# EAGLE board airflow_sensor_DC (EAGLE 9.5.2)
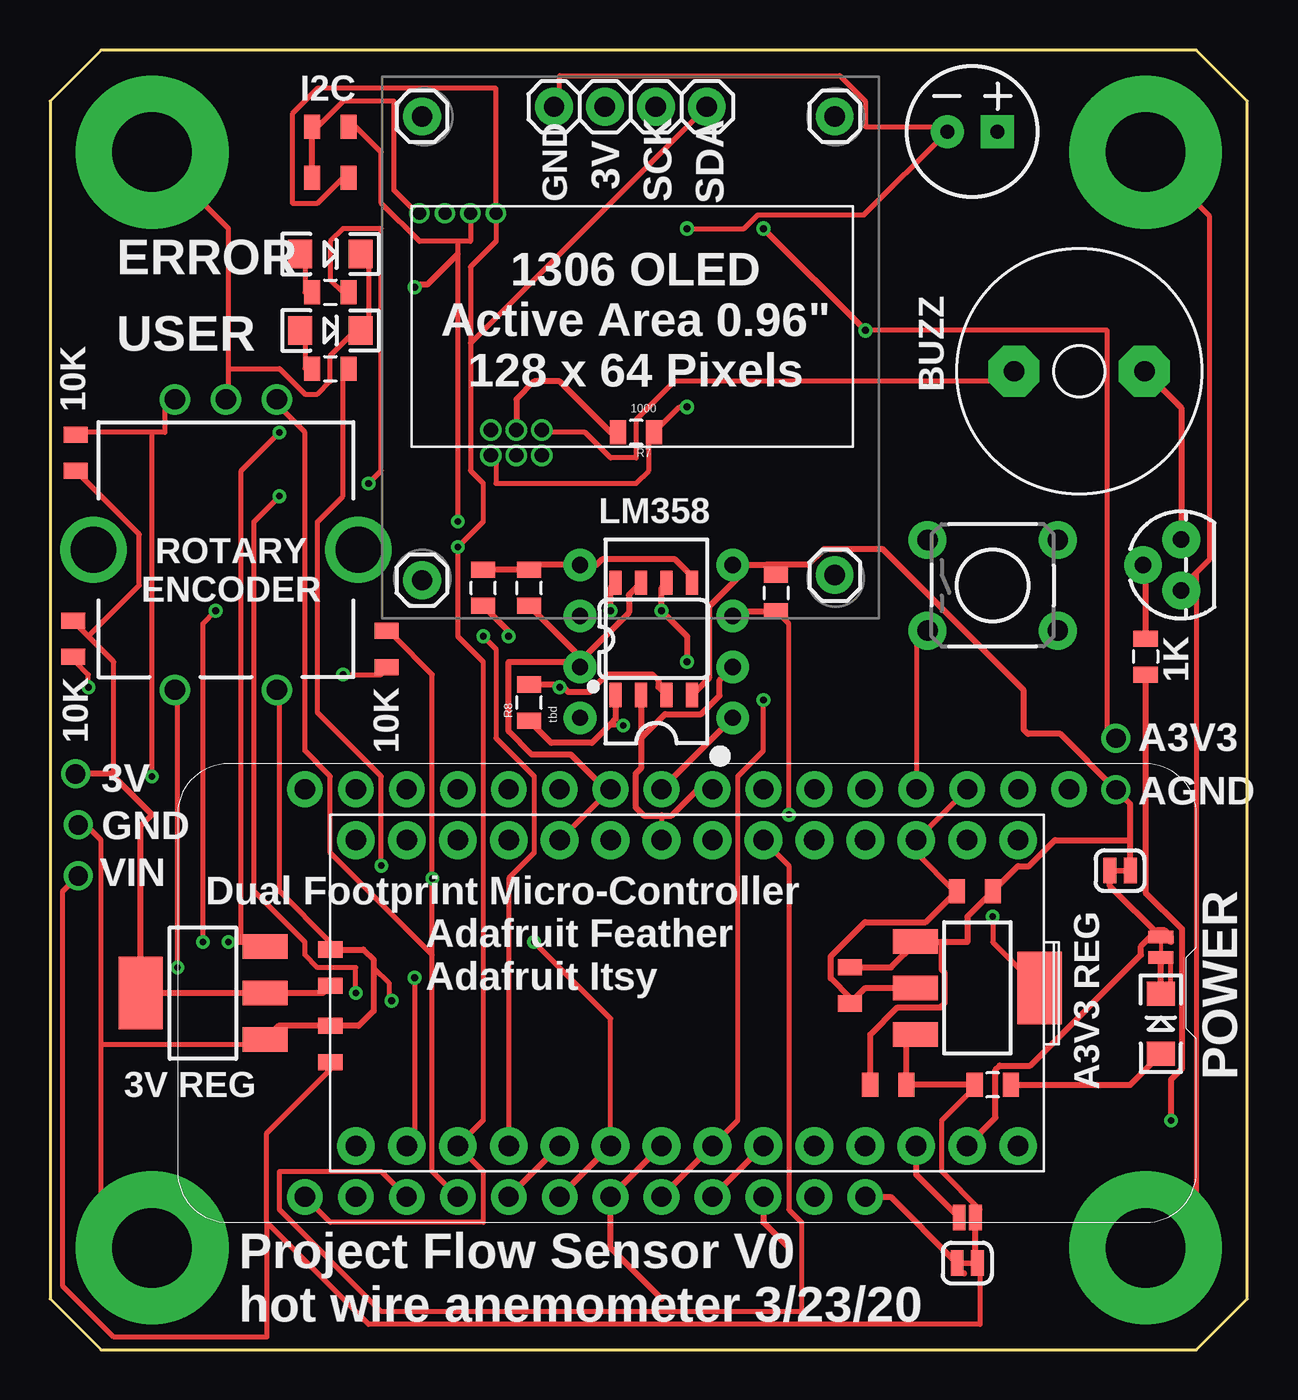
[diagram p0: board, top side]
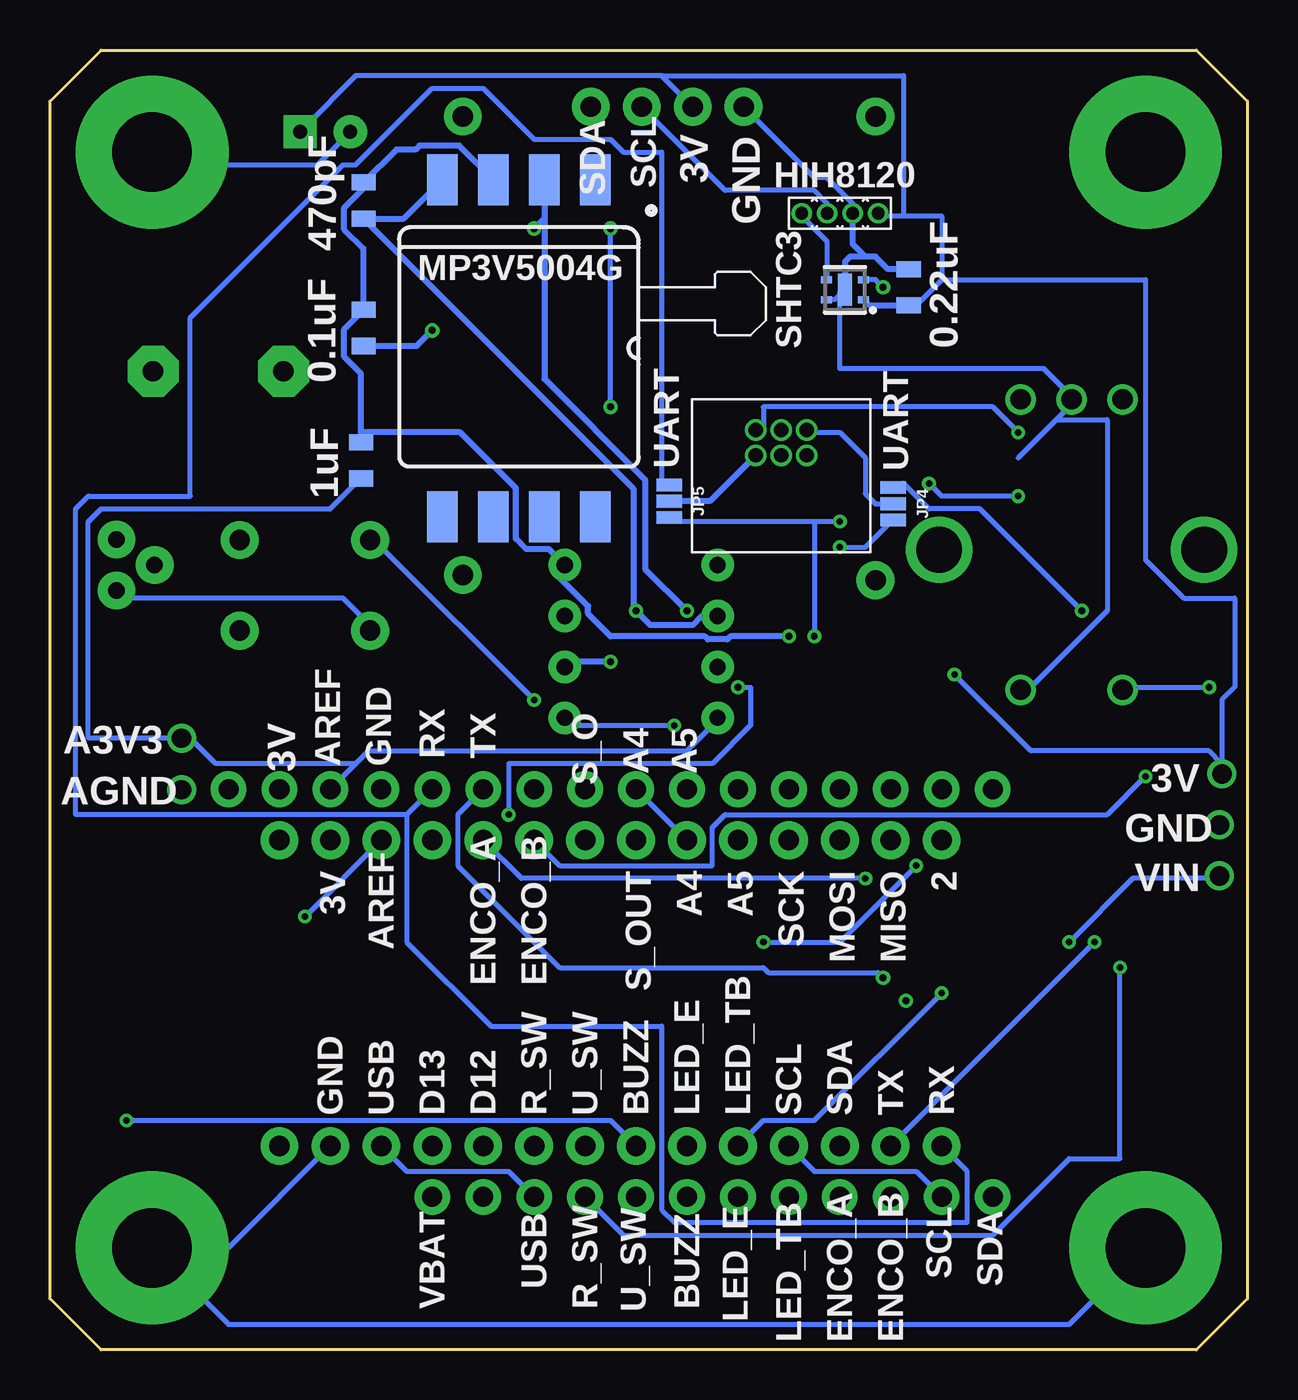
[diagram p1: board, bottom side, seen from below]

Size 59.69 x 64.77 mm. Coordinates in mm from the lower left corner, seen from the top.
Outline: 0,62.23 0,2.54 2.54,0 57.15,0 59.69,2.54 59.69,62.23 57.15,64.77 2.54,64.77 0,62.23
Copper layers (1*16): Top 0.0356mm / dielectric 1.5011mm / Bottom 0.0356mm
Design rules "LaenPCBOrder *": minimum track width 10mil, minimum drill 13mil, track to track 8mil, track to pad 8mil, pad to pad 8mil, via to via 8mil, smd to smd 6mil, copper to edge 15mil, drill to drill 6mil, minimum pad ring 7mil, minimum via ring 7mil, stop-mask expansion 3mil, vias tented up to drill 25mil, thermal gap 10mil
Net classes: 1 highpower: width 0.305 mm, drill 0.483 mm; 2 lowpower: width 0.305 mm, drill 0.483 mm

## Footprints (pad centres in the part's own frame; a part is rotated, then mirrored left to right if it is on the bottom)
SOT223 = smd 1.219 x 2.235: 1 -2.311,-3.099; 2 0,-3.099; 3 2.311,-3.099 | smd 3.6 x 2.2: 4 0,3.099
0805 = smd 0.8 x 1.2: 1 -0.9,0; 2 0.9,0
CPOL-RADIAL-2.5MM-6.5MM = drill 0.7 pad 1.651 square: 1 1.25,0 | drill 0.7 pad 1.651: 2 -1.25,0
LED-1206 = smd 1.2 x 1.4: A -1.5,0; C 1.5,0
1X01 = drill 1.016 pad 1.88: 1 0,0
SMT-JUMPER_2_NO_NO-SILK = smd 0.635 x 1.27: 1 -0.406,0; 2 0.406,0
SMT-JUMPER_2_NC_TRACE_SILK = smd 0.635 x 1.27: 1 -0.508,0; 2 0.508,0
SMT-JUMPER_3_NO_NO-SILK = smd 0.635 x 1.27: 1 -0.813,0; 2 0,0; 3 0.813,0
FEATHERWING_DIM = drill 1 pad 1.778: 1 6.35,1.27; 2 8.89,1.27; 3 11.43,1.27; 4 13.97,1.27; 5 16.51,1.27; 6 19.05,1.27; 7 21.59,1.27; 8 24.13,1.27; 9 26.67,1.27; 10 29.21,1.27; 11 31.75,1.27; 12 34.29,1.27; 13 36.83,1.27; 14 39.37,1.27; 15 41.91,1.27; 16 44.45,1.27; 17 44.45,21.59; 18 41.91,21.59; 19 39.37,21.59; 20 36.83,21.59; 21 34.29,21.59; 22 31.75,21.59; 23 29.21,21.59; 24 26.67,21.59; 25 24.13,21.59; 26 21.59,21.59; 27 19.05,21.59; 28 16.51,21.59
TO-92 = drill 0.813 pad 1.88: 1 -1.27,0; 2 0,1.905; 3 1.27,0
STANDOFF_ELECTRICAL_5_32 = drill 3.969 pad 7.62: P1 0,0
TACTILE_SWITCH_PTH_6.0MM_KIT = drill 1.016 pad 1.88: 1 -3.251,2.261; 2 3.251,2.261; 3 -3.251,-2.261; 4 3.251,-2.261
ROTARY_ENC_PLAIN = drill 1.016: A 7.493,-2.54; B 7.493,2.54; C 7.493,0; SW+ -6.985,2.54; SW- -6.985,-2.54 | drill 2.286: P$3 0,6.604; P$4 0,-6.604
PAD-JUMPER-2-NC_BY_TRACE_NO_SILK = smd 0.635 x 1.27: 1 -0.508,0; 2 0.508,0
AL60P = drill 1.016 pad 2.54 octagon: 1 -3.251,0; 2 3.251,0
DIP08 = drill 0.813 pad 1.626: 1 -3.81,-3.81; 2 -1.27,-3.81; 3 1.27,-3.81; 4 3.81,-3.81; 5 3.81,3.81; 6 1.27,3.81; 7 -1.27,3.81; 8 -3.81,3.81
SO08 = smd 0.6 x 1.2: 1 -1.905,-2.8; 2 -0.635,-2.8; 3 0.635,-2.8; 4 1.905,-2.8; 5 1.905,2.8; 6 0.635,2.8; 7 -0.635,2.8; 8 -1.905,2.8
SHTC3 = smd 0.55 x 0.35: 1 -0.925,0.5; 2 -0.925,-0.5; 3 0.925,-0.5; 4 0.925,0.5 | smd 0.7 x 1.6: 5 0,0
OLED_1306 = drill 1.016 pad 1.88: 3V 11.15,-1.55; GND 8.61,-1.55; SCK 13.69,-1.55; SDA 16.23,-1.55
MP3V5004GP = smd 2.54 x 1.524: 1 -8.388,3.81; 2 -8.388,1.27; 3 -8.388,-1.27; 4 -8.388,-3.81; 5 8.388,-3.81; 6 8.388,-1.27; 7 8.388,1.27; 8 8.388,3.81
HIH8120_TH = drill 0.635 pad 1.016: 1 -1.905,0; 2 -0.635,0; 3 0.635,0; 4 1.905,0
1X01-40MILL = drill 0.965 pad 1.397: 1 0,0
F660/F662 = drill 0.711 pad 1.067: 1 0,0; 2 0,1.27; 3 -1.27,0; 4 -1.27,1.27; 5 -2.54,0; 6 -2.54,1.27
ADAFRUIT_ITS_MO_28 = drill 1.016 pad 1.88: 2 -7.62,-8.89; 3V -7.62,21.59; A0 -7.62,13.97; A1 -7.62,11.43; A2 -7.62,8.89; A3 -7.62,6.35; A4 -7.62,3.81; A5 -7.62,1.27; AREF -7.62,19.05; D5 7.62,1.27; D7 7.62,3.81; D9 7.62,6.35; D10 7.62,8.89; D11 7.62,11.43; D12 7.62,13.97; D13 7.62,16.51; GND 7.62,21.59; MISO -7.62,-6.35; MOSI -7.62,-3.81; RES -7.62,24.13; RX 7.62,-8.89; SCK -7.62,-1.27; SCL 7.62,-1.27; SDA 7.62,-3.81; TX 7.62,-6.35; USB 7.62,19.05; VHI -7.62,16.51; VIN 7.62,24.13

## Placement (x,y rotation side)
3V_REGULATOR  LDL1117_5V_REG  [SOT223]  46.23,18.03 270 top
3V_REGULATOR1  LDL1117_5V_REG  [SOT223]  7.62,17.78 90 top
C1  1uF  [0805]  44.2,44.32 270 bottom
C2  470pF  [0805]  44.07,57.28 270 bottom
C3  0.22uF  [0805]  16.89,52.96 90 bottom
C4  [0805]  41.78,13.21 180 top
C5  [0805]  46.1,22.86 0 top
C6  0.1uF  [0805]  44.07,50.93 270 bottom
C7  0.1uF  [0805]  39.88,18.16 90 top
C8  [0805]  13.97,15.24 90 top
C9  [0805]  13.97,19.05 90 top
C11  100uF  [CPOL-RADIAL-2.5MM-6.5MM]  45.97,60.71 0 top
D1  YELLOW  [LED-1206]  13.97,54.61 0 top
D2  RED  [LED-1206]  55.37,16.26 90 top
D4  YELLOW  [LED-1206]  13.97,50.8 0 top
J1  [1X01]  18.54,38.35 0 top
J2  [1X01]  39.12,38.61 0 top
J3  [1X01]  39.12,61.47 0 top
J4  [1X01]  18.54,61.47 0 top
JP1  JUMPER-SMT_2_NO_NO-SILK  [SMT-JUMPER_2_NO_NO-SILK]  45.72,6.6 180 top
JP2  JUMPER-SMT_2_NC_TRACE_SILK  [SMT-JUMPER_2_NC_TRACE_SILK]  45.72,4.32 180 top
JP3  JUMPER-SMT_2_NC_TRACE_SILK  [SMT-JUMPER_2_NC_TRACE_SILK]  53.34,23.88 180 top
JP4  JUMPER-SMT_3_NO_NO-SILK  [SMT-JUMPER_3_NO_NO-SILK]  17.65,42.16 270 bottom
JP5  JUMPER-SMT_3_NO_NO-SILK  [SMT-JUMPER_3_NO_NO-SILK]  28.83,42.29 270 bottom
MS2  FEATHERWING_NODIM  [FEATHERWING_DIM]  57.15,29.21 180 top
Q2  200mA/40V  [TO-92]  56.39,39.12 90 top
R3  tbd  [0805]  36.2,37.72 270 top
R4  tbd  [0805]  23.88,37.97 90 top
R5  tbd  [0805]  21.59,37.97 90 top
R7  1000  [0805]  29.21,45.72 180 top
R8  tbd  [0805]  23.88,32.26 90 top
R11  1000  [0805]  13.97,48.9 0 top
R12  1000  [0805]  46.99,13.21 180 top
R21  0.3  [0805]  13.97,58.42 180 top
R22  0.3  [0805]  13.97,60.96 180 top
R23  1000  [0805]  13.97,52.7 0 top
R24  1K  [0805]  54.61,34.54 270 top
R26  10K  [0805]  1.27,44.7 270 top
R27  10K  [0805]  16.76,34.92 90 top
R28  10K  [0805]  1.14,35.43 90 top
S1  STANDOFF_ELECTRICAL5-32  [STANDOFF_ELECTRICAL_5_32]  5.08,59.69 0 top
S2  STANDOFF_ELECTRICAL5-32  [STANDOFF_ELECTRICAL_5_32]  5.08,5.08 0 top
S3  MOMENTARY-SWITCH-SPST-PTH-6.0MM-KIT  [TACTILE_SWITCH_PTH_6.0MM_KIT]  46.99,38.1 0 top
S4  STANDOFF_ELECTRICAL5-32  [STANDOFF_ELECTRICAL_5_32]  54.61,59.69 0 top
S5  ENCODER-SWITCH  [ROTARY_ENC_PLAIN]  8.76,39.88 90 top
S6  STANDOFF_ELECTRICAL5-32  [STANDOFF_ELECTRICAL_5_32]  54.61,5.08 0 top
SJ1  PWR-LED  [PAD-JUMPER-2-NC_BY_TRACE_NO_SILK]  55.37,20.07 270 top
SP2  AL60P  [AL60P]  51.31,48.77 0 top
U1  LM358  [DIP08]  30.23,35.31 90 top
U3  LMV358  [SO08]  30.1,35.43 0 top
U5  SHTC3  [SHTC3]  20.07,52.83 180 bottom
U$1  OLED_1306  [OLED_1306]  16.51,63.5 0 top
U$2  MP3V5004GSINGLE  [MP3V5004GP]  36.32,49.92 270 bottom
U$4  HIH8000_  [HIH8120_TH]  20.32,56.64 180 bottom
U$20  CONN_0138MILL  [1X01-40MILL]  1.27,28.7 270 top
U$26  CONN_0138MILL  [1X01-40MILL]  53.14,27.91 0 top
U$28  DEGREE_CONTROLS_F66X  [F660/F662]  21.97,44.58 0 bottom
U$31  CONN_0138MILL  [1X01-40MILL]  1.4,26.16 270 top
U$39  CONN_0138MILL  [1X01-40MILL]  53.14,30.48 270 top
U$40  CONN_0138MILL  [1X01-40MILL]  1.4,23.62 270 top
U$45  ADAFRUIT_ITSY_M0_28  [ADAFRUIT_ITS_MO_28]  24.13,17.78 270 top

## Library data of the parts
3V_REGULATOR 3V_REGULATOR1 = th_libraries_2
C1-C9 = SparkFun-Capacitors
C11 = SparkFun-Capacitors; PROD_ID: CAP-08439
D1 D4 = SparkFun-LED; PROD_ID: DIO-00820
D2 = SparkFun-LED; PROD_ID: DIO-00809
J1-J4 = SparkFun-Connectors
JP1-JP5 = SparkFun-Jumpers
MS2 S1 S2 S4 S6 = th_libraries
Q2 = SparkFun-DiscreteSemi; PROD_ID: TRANS-08447
R3-R5 R7 R8 R11 R12 R23 R24 SJ1 = SparkFun-Passives
R21 R22 R26-R28 = SparkFun-Resistors; PROD_ID: RES-11622
S3 = SparkFun-Switches; PROD_ID: SWCH-08441; SF_SKU: COM-00097
S5 = SparkFun-Switches; SF_SKU: COM-09117
SP2 = buzzer; OC_FARNELL: unknown; OC_NEWARK: unknown
U1 = SparkFun-IC-Amplifiers; PROD_ID: IC-09172
U3 = SparkFun-IC-Amplifiers; PROD_ID: IC-09657
U5 = SHTC3
U$1 U$28 = air_flow
U$2 U$4 = air_flow_2
U$20 U$26 U$31 U$39 U$40 = th_libraries3
U$45 = easy_bee_counter

## Nets
3.3V: 3V_REGULATOR.2 3V_REGULATOR.4 C1.2 C5.1 C6.2 C7.1 MS2.3 U1.8 U3.8 U$2.2 U$39.1 U$45.AREF
3V: 3V_REGULATOR1.2 3V_REGULATOR1.4 C3.1 C9.1 C11.1 R21.2 R22.2 R26.2 R27.1 R28.2 U5.1 U$1.3V U$4.1 U$20.1
A4: MS2.9 R8.1 U1.1 U3.1 U$45.A4
A5: MS2.10 R4.1 U1.7 U3.7 U$45.A5
AGND: 3V_REGULATOR.1 C1.1 C2.1 C4.2 C5.2 C6.1 C7.2 JP3.1 R3.1 R5.1 U1.4 U3.4 U$2.3 U$26.1
GND: 3V_REGULATOR1.1 C3.2 C8.2 C9.2 C11.2 D1.C D4.C JP3.2 MS2.4 Q2.1 R7.1 S1.P1 S2.P1 S3.3 S4.P1 S5.C S5.SW- S6.P1 SJ1.1 U5.4 U5.5 U$1.GND U$4.2 U$28.1 U$31.1 U$45.GND
LED_ERROR: MS2.22 R11.2 U$45.D7
LED_TBD: MS2.21 R23.2 U$45.D5
N$1: R3.2 R8.2 U1.3 U3.3
N$2: D2.A R12.1
N$3: D1.A R23.1
N$5: R4.2 R5.2 U1.5 U3.5
N$7: MS2.16
N$9: Q2.3 SP2.2
N$10: Q2.2 R24.1
N$11: D4.A R11.1
N$12: D2.C SJ1.2
N$13: MS2.15
N$14: MS2.14
N$15: MS2.13
N$16: MS2.12
N$17: MS2.11
N$20: R7.2 U$28.4
PWM_BUZZER: MS2.23 R24.2 U$45.D9
ROTARY_A: MS2.20 R27.2 S5.A U$45.A0
ROTARY_B: MS2.19 R26.1 S5.B U$45.A1
ROTARY_SWITCH: MS2.25 R28.1 S5.SW+ U$45.D11
RX: JP5.1 MS2.5 U$45.RX
RX/SDA: JP4.2 U$28.2
S_OUT: C2.2 MS2.8 U1.2 U1.6 U3.2 U3.6 U$2.4 U$45.A3
SCL: JP5.3 MS2.18 R22.1 U5.2 U$1.SCK U$4.3 U$45.SCL
SDA: JP4.3 MS2.17 R21.1 U5.3 U$1.SDA U$4.4 U$45.SDA
SWITCH1: MS2.24 S3.1 U$45.D10
TX: JP4.1 MS2.6 U$45.TX
TX/SCL: JP5.2 U$28.5
USB: JP1.2 MS2.26 U$45.USB
VBAT: JP2.2 MS2.28
VIN: 3V_REGULATOR1.3 3V_REGULATOR.3 C4.1 C8.1 JP1.1 JP2.1 R12.2 SP2.1 U$28.6 U$40.1

## Tracks (layer width: path | path; a pad name or v marks a point on that pad's centre or on a via)
3.3V  (via drill 0.33, 0.35)
  Top 0.254: v46.99,21.59 46.99,20.32 48.9,18.41 3V_REGULATOR.4 | C5.1 45.09,22.86 43.18,24.77 U$45.AREF MS2.3 | v40.64,50.8 52.7,50.8 52.7,30.48 U$39.1
  Top 0.305: v27.94,36.83 27.94,37.98 U3.8 | 3V_REGULATOR.2 40.65,18.03 C7.1 39.88,17.56 38.92,18.51 38.92,19.61 40.62,21.31 43.65,21.31 C5.1 | v40.64,50.8 v35.56,55.88
  Bottom 0.254: C1.2 44.45,43.18 45.72,41.91 57.15,41.91 57.78,41.27 57.78,30.48 U$39.1 52.7,30.48 51.44,29.21 44.45,29.21 | U$45.AREF v46.99,21.59 | MS2.3 44.45,29.21 | 44.45,29.21 43.81,29.84 27.94,29.84 26.67,31.11 U1.8
  Bottom 0.305: U$2.2 35.05,56.39 | 35.05,56.39 35.05,48.39 30.02,43.36 30.02,38.91 v27.94,36.83 | C6.2 41.41,50.03 v40.64,50.8 | v35.56,55.88 35.05,56.39
3V  (via drill 0.33)
  Top 0.254: 1.9,35.56 3.17,34.29 3.17,28.57 | 1.9,35.56 1.27,36.2 R28.2 | 1.9,35.56 4.44,38.1 4.44,40.64 1.27,43.81 R26.2 | v14.6,33.66 16.51,33.66 R27.1 | R22.2 13.33,60.96 14.6,62.23 17.14,62.23 17.14,57.79 18.41,56.51 U$4.1
  Top 0.305: C9.1 13.6,17.78 3V_REGULATOR1.2 3V_REGULATOR1.4 | 3.81,17.78 3V_REGULATOR1.4 | 3V_REGULATOR1.4 4.52,26.11 5.08,26.67 3.17,28.57 3.05,28.7 U$20.1 | R21.2 R22.2
  Bottom 0.254: v14.6,33.66 10.79,29.84 1.9,29.84 1.27,29.21 | 15.24,53.34 16.51,52.07 C3.1 | 15.24,53.34 15.24,56.51 17.14,56.51 | 17.14,56.51 18.41,56.51 U$4.1 | 29.21,63.5 44.45,63.5 46.99,60.96 C11.1 | U$1.3V 29.21,63.5 | 17.14,56.51 17.14,63.5 29.21,63.5 | 1.27,29.21 1.27,32.38 0.63,33.02 0.63,37.46 3.17,37.46 5.08,39.37 5.08,53.34 15.24,53.34 | 1.27,29.21 U$20.1
  Bottom 0.305: U5.1 18.87,52.06 C3.1
A4  (via drill 0.33)
  Top 0.254: v28.58,31.11 27.94,31.11 27.91,31.15
  Top 0.305: U3.1 28.19,31.44 27.91,31.15 27.01,30.25 24.98,30.25 R8.1 | U1.1 MS2.9
  Bottom 0.254: v28.58,31.11 33.66,31.11 U1.1 | U$45.A4 MS2.9
A5
  Top 0.254: MS2.10 U$45.A5
  Top 0.305: MS2.10 27.69,27.94 25.96,29.67 24.01,29.67 22.86,30.82 22.86,34.29 26.16,34.29 | 26.16,34.29 U1.7 26.42,34.3 28.85,36.74 28.85,37.62 U3.7 | R4.1 26.16,34.79 26.16,34.29
AGND  (via drill 0.35)
  Top 0.305: U1.4 34.29,39.12 | 34.29,39.12 35.7,39.12 | 35.7,39.12 R3.1 | U3.4 32.87,33.5 32.87,37.06 34.29,38.48 34.29,39.12 | R5.1 22.86,35.8 v22.86,35.56 | C7.2 41.92,19.06 43.18,20.32 | 43.18,20.32 43.16,20.34 3V_REGULATOR.1 | 44.45,20.32 45.72,20.32 45.72,21.58 C5.2 48.25,24.1 48.8,24.1 50.09,25.4 53.85,25.4 | 44.45,20.32 43.18,20.32 | 44.45,20.32 44.45,18.94 44.6,18.79 44.6,17.28 44.39,17.07 42.25,17.07 40.88,15.71 C4.2 | JP3.1 53.85,25.4 | 53.85,25.4 53.85,27.2 U$26.1 50.36,30.7 48.75,30.7 48.54,30.9 48.54,32.87 41.51,39.9 38.58,39.9 37.79,39.12 35.7,39.12
  Bottom 0.305: U$2.3 39.29,60.01 41.27,60.01 41.46,59.82 42.43,59.82 C2.1 44.07,57.88 45.02,56.92 45.02,55.83 44.07,54.87 C6.1 45.02,50.87 45.02,49.48 44.2,48.65 44.2,45.72 | C1.1 44.2,45.72 | U1.4 34.29,39.37 | 34.29,39.37 34.82,39.9 35.96,39.9 36.47,40.42 36.47,42.95 39.25,45.72 44.2,45.72 | v22.86,35.56 25.78,35.56 25.93,35.41 26.9,35.41 27.05,35.56 31.75,35.56 32.87,36.68 32.87,37.06 34.29,38.48 34.29,39.37
GND  (via drill 0.35)
  Top 0.254: 55.88,20.32 SJ1.1 | MS2.4 43.18,35.56 S3.3 | 57.15,38.73 57.78,39.37 57.78,56.51 S4.P1 | 57.15,38.73 56.52,38.1 Q2.1 | S6.P1 57.15,7.62 57.15,38.73 | S5.SW- 11.43,32.38 11.43,22.86 13.97,20.32 C9.2 | 2.54,15.24 2.54,7.62 S2.P1 | 2.54,15.24 2.54,25.4 1.9,26.03 U$31.1 | 2.54,15.24 10.16,15.24 3V_REGULATOR1.1 | U$28.1 22.23,44.45 22.23,43.18 29.21,43.18 29.84,43.81 29.84,45.72 R7.1 31.38,46.99 v31.75,46.99 | D1.C 15.87,54.61 15.87,50.8 D4.C 15.24,50.8 13.97,49.53 13.97,48.26 13.33,47.62 12.7,47.62 11.43,48.9 8.89,48.9 | 8.89,48.9 8.89,47.62 S5.C | S1.P1 8.89,55.88 8.89,48.9 | U$1.GND 25.4,62.23 25.4,63.5 39.37,63.5 40.64,62.23 40.64,60.96 44.45,60.96 C11.2 40.58,56.56 35.28,56.56 34.59,55.88 v31.75,55.88 | 16.13,19.05 16.89,18.29 16.89,17.4 v17.02,17.4
  Top 0.305: SJ1.1 52.83,23.11 JP3.2 | U$45.GND 47.13,11.57 47.13,13.96 47.34,14.16 48.86,14.16 54.38,19.69 54.38,20.1 55.18,20.9 55.56,20.9 55.83,20.64 | 55.83,20.64 55.88,20.59 55.88,20.32 55.83,20.37 55.83,20.64 | 3V_REGULATOR1.1 11.39,16.14 C8.2 15.38,16.14 16.13,16.89 16.13,19.05 16.13,19.43 15.61,19.95 C9.2
  Bottom 0.254: U$45.GND 50.8,5.08 S6.P1 50.8,1.27 8.89,1.27 S2.P1 | Q2.1 55.88,37.46 45.09,37.46 43.81,36.2 S3.3 | S4.P1 53.97,59.05 46.36,59.05 45.09,60.32 C11.2 | U$1.GND 21.59,58.42 20.95,58.42 19.69,57.15 U$4.2 | 9.53,46.35 8.89,46.99 S5.C 8.89,47.62 10.16,48.9 20.32,48.9 20.32,52.7 U5.5 20.57,52.33 U5.4 | 9.53,46.35 11.43,44.45 | 21.59,44.45 U$28.1 | 9.53,46.35 6.98,46.35 6.98,36.83 10.79,33.02 S5.SW- | v31.75,46.99 v31.75,55.88
  Bottom 0.305: C3.2 17.92,53.86 18.54,54.48 19.05,54.48 | 19.05,54.48 19.81,54.48 20.07,54.23 U5.5 | U$4.2 19.69,55.12 19.05,54.48
LED_ERROR  (via drill 0.33)
  Top 0.254: v16.51,24.13 16.51,28.57 13.33,31.75 13.33,41.27 14.6,42.54 14.6,48.9 R11.2 | v24.13,20.32 27.94,16.51 U$45.D7
  Top 0.305: MS2.22 U$45.D7
  Bottom 0.254: v16.51,24.13 20.32,20.32 v24.13,20.32
LED_TBD  (via drill 0.33)
  Top 0.254: v15.87,43.18 16.51,43.81 16.51,55.88 14.6,55.88 13.97,55.24 13.97,53.34 14.6,52.7 R23.2 | v11.43,42.54 10.16,41.27 10.16,22.86 12.7,20.32 12.7,19.68 13.33,19.05 15.24,19.05 v15.24,17.78
  Top 0.305: MS2.21 U$45.D5
  Bottom 0.254: v15.87,43.18 15.24,42.54 v11.43,42.54 | v15.24,17.78 21.59,11.43 24.13,11.43 U$45.D5
N$1  (via drill 0.33)
  Top 0.254: v36.83,26.67 36.83,36.2 R3.2 | v25.4,33.02 25.5,33.12
  Top 0.305: U1.3 34.28,36.82 R3.2 | R8.2 25.46,33.16 25.5,33.12 25.83,32.79 26.89,32.79 27.77,33.66 30.02,33.66 30.32,33.36 30.32,33.04 U3.3
  Bottom 0.254: v36.83,26.67 36.83,29.21 26.67,29.21 24.77,31.11 24.77,33.02 v25.4,33.02
N$2
  Top 0.305: R12.1 53.85,13.21 55.37,14.73 D2.A
N$3
  Top 0.254: R23.1 12.7,52.7 12.7,54.61 D1.A
N$5
  Top 0.305: U3.5 32,38.55 31.16,39.39 27.51,39.39 27.24,39.12 U1.5 24.12,39.12 R4.2 R5.2
N$9
  Top 0.305: SP2.2 56.39,46.94 Q2.3
N$10
  Top 0.305: Q2.2 54.61,38.99 R24.1
N$11
  Top 0.254: R11.1 12.7,48.9 12.7,50.8 D4.A
N$12
  Top 0.254: SJ1.2 55.88,19.68 55.88,17.78 D2.C
  Top 0.305: D2.C 55.37,19.23
N$20
  Top 0.305: R7.2 27.94,45.72 25.4,48.26 24.13,48.26 23.24,47.37 U$28.4
PWM_BUZZER  (via drill 0.33)
  Top 0.305: v55.88,11.43 55.88,13.46 56.43,14.01 56.43,20.97 54.61,22.79 R24.2 | 30.48,2.54 27.94,5.08 MS2.23 U$45.D9
  Bottom 0.254: U$45.D9 31.75,11.43 v55.88,11.43
ROTARY_A  (via drill 0.33)
  Top 0.254: 19.05,19.68 19.05,8.89 MS2.20 | 19.05,19.68 v19.05,23.49 19.05,33.66 17.14,35.56 R27.2 | 19.05,19.68 13.97,24.77 13.97,28.57 12.7,29.84 12.7,45.72 11.43,46.99 S5.A
  Bottom 0.254: U$45.A0 36.2,23.49 v19.05,23.49
ROTARY_B  (via drill 0.33)
  Top 0.254: 5.08,45.72 5.71,45.72 5.71,46.99 S5.B | 5.08,45.72 1.27,45.72 R26.1 | MS2.19 16.51,8.89 11.43,8.89 11.43,6.99 16.51,1.9 37.47,1.9 37.47,6.35 36.83,6.99 36.83,24.13 U$45.A1 | v5.08,28.57 5.08,45.72
  Bottom 0.254: v5.08,28.57 6.98,26.67 26.04,26.67 26.67,26.03 26.67,24.13 34.29,24.13 U$45.A1
ROTARY_SWITCH  (via drill 0.33)
  Top 0.254: v1.9,33.02 1.9,33.66 1.27,34.29 R28.1 | v6.35,19.05 6.35,32.38 S5.SW+
  Top 0.305: MS2.25 U$45.D11
  Bottom 0.254: v1.9,33.02 5.71,33.02 S5.SW+ | v6.35,19.05 6.35,9.53 8.89,9.53 12.7,5.71 31.12,5.71 MS2.25
RX
  Bottom 0.254: 41.91,26.67 58.42,26.67 58.42,41.91 57.78,42.54 52.7,42.54 52.7,51.43 45.09,59.05 44.45,59.05 40.64,62.87 38.1,62.87 35.56,60.32 31.75,60.32 31.12,59.69 29.21,59.69 29.21,43.18 JP5.1 | MS2.5 41.91,26.67 | U$45.RX 13.97,8.89 13.97,6.35 28.58,6.35 29.21,6.99 29.21,16.13 37.72,16.13 41.91,20.32 41.91,26.67
RX/SDA
  Bottom 0.254: U$28.2 21.84,45.72 20.32,45.72 19.05,44.45 19.05,42.67 18.54,42.16 JP4.2
S_OUT  (via drill 0.35)
  Top 0.254: U$45.A3 30.48,26.62 30.48,26.67
  Top 0.305: U3.6 30.48,37.98 v30.48,36.83 31.75,35.56 v31.75,34.29 | U3.2 29.46,30.48 | 29.46,30.48 29.46,28.99 29.19,28.71 29.19,27.04 29.61,26.62 30.48,26.62 30.97,26.62 32.3,27.94 MS2.8 | 29.46,30.48 30.66,31.68 32.45,31.68 33.38,32.6 33.38,33.38 U1.2
  Bottom 0.305: U$2.4 42.06,56.38 C2.2 30.61,42.91 30.61,36.96 v30.48,36.83 29.77,36.12 27.65,36.12 27.19,36.58 U1.6 | v31.75,34.29 33.78,34.29 U1.2
SCL  (via drill 0.33, 0.35)
  Top 0.254: 20.32,55.24 20.95,55.24 U$4.3 | 20.32,55.24 18.41,55.24 16.51,57.15 16.51,59.69 15.24,60.96 R22.1 | 20.32,55.24 20.32,54.61 v20.32,41.27 | U$45.SCL 22.86,23.49 24.13,24.77 24.13,28.57 22.23,30.48 22.23,34.92 v21.59,35.56 | 18.16,53.09 v18.16,52.96
  Top 0.305: 20.32,54.61 18.8,53.09 18.16,53.09
  Bottom 0.254: MS2.18 16.51,8.89 21.59,8.89 U$45.SCL | v20.32,41.27 21.59,41.27 | 21.59,41.27 28.58,41.27 JP5.3 | U$1.SCK 26.04,57.79 21.59,57.79 20.95,57.15 U$4.3 20.95,56.51 | 21.59,41.27 v21.59,35.56 | v18.16,52.96 18.53,53.33 U5.2
SDA  (via drill 0.33)
  Top 0.254: MS2.17 13.97,6.35 21.59,6.35 21.59,8.89 U$45.SDA 21.59,11.43 21.59,34.29 20.32,35.56 v20.32,40 21.59,41.27 21.59,43.18 20.95,43.81 20.95,50.16 | R21.1 14.6,58.42 13.33,57.15 12.06,57.15 12.06,61.59 13.33,62.87 22.23,62.87 U$4.4 22.23,56.51 22.23,55.24 20.95,53.98 20.95,50.16 | 20.95,50.16 U$1.SDA
  Bottom 0.254: U5.3 20.95,53.34 20.95,55.24 22.23,56.51 U$4.4 | v20.32,40 19.05,40 17.78,41.27 JP4.3
SWITCH1  (via drill 0.33)
  Top 0.254: v35.56,32.38 35.56,29.84 34.29,28.57 34.29,11.43 U$45.D10
  Top 0.305: MS2.24 U$45.D10
  Bottom 0.254: v35.56,32.38 43.18,40 S3.1
TX  (via drill 0.33, 0.35)
  Top 0.254: v8.26,36.83 7.62,36.2 v7.62,20.32 | v18.16,18.54 18.16,10.54 U$45.TX
  Bottom 0.254: v8.26,36.83 13.33,41.91 15.87,41.91 17.14,43.18 JP4.1 | U$45.TX v7.62,20.32 | MS2.6 39.37,26.67 39.37,24.13 34.29,19.05 24.13,19.05 23.88,18.8 18.41,18.8 v18.16,18.54
TX/SCL
  Bottom 0.305: U$28.5 26.8,42.29 JP5.2
USB
  Top 0.305: MS2.26 35.56,6.35 36.83,5.08 | JP1.2 43.18,8.74 U$45.USB
  Bottom 0.254: MS2.26 36.83,8.89 41.91,8.89 U$45.USB
VBAT
  Top 0.254: 45.16,4.37 JP2.2
  Top 0.305: MS2.28 41.91,7.62 45.09,4.44 45.16,4.37 45.16,4.04 45.37,3.83 45.53,3.83 45.55,3.81
VIN  (via drill 0.33)
  Top 0.254: U$28.6 24.77,45.72 26.67,45.72 27.94,44.45 29.21,44.45 29.21,46.35 31.12,48.26 47.62,48.26 SP2.1 | v8.89,20.32 9.53,20.32 | 9.53,20.32 10.16,20.32 3V_REGULATOR1.3 | 10.79,6.35 10.79,10.79 13.97,13.97 C8.1 | 10.79,6.35 15.87,1.27 46.36,1.27 46.36,3.81 JP2.1 | R12.2 45.72,12.7 44.45,11.43 44.45,8.89 46.36,6.99 JP1.1 | U$40.1 0.63,22.86 0.63,3.17 3.17,0.63 10.79,0.63 10.79,6.35 | v11.43,45.72 9.53,43.81 9.53,20.32
  Top 0.305: 3V_REGULATOR.3 42.68,15.28 C4.1 R12.2 | JP2.1 46.13,4.42 JP1.1
  Bottom 0.254: v8.89,20.32 5.71,23.49 1.9,23.49 U$40.1 | v11.43,45.72 12.7,46.99 24.13,46.99 24.13,45.72 U$28.6

## Text on the board
tPlace: I2C | ERROR | USER | BUZZ | LM358 | ROTARY / ENCODER | A3V3 | 3V | AGND | GND | Dual Footprint Micro-Controller / Adafruit Feather / Adafruit Itsy | VIN | A3V3 REG | POWER | 3V REG | Project Flow Sensor V0 / hot wire anemometer 3/23/20
bPlace: GND | 3V | HIH8120 | SCL | SDA | MP3V5004G | SHTC3 | UART | UART | S_O | A5 | A4 | 3V | TX | RX | A3V3 | GND | AREF | 3V | AGND | GND | 2 | MISO | MOSI | SCK | A5 | A4 | S_OUT | 3V | VIN | AREF | ENCO_B | ENCO_A | RX | TX | SDA | SCL | LED_TB | LED_E | BUZZ | U_SW | R_SW | D12 | D13 | USB | GND | SCL | SDA | USB | LED_E | BUZZ | U_SW | R_SW | VBAT | ENCO_B | ENCO_A | LED_TB